# Altium PCB Standard 60 02.PcbDoc
Units mil, origin at the board's own origin, x right, y up, seen from the top; angles counter-clockwise.
Board outline 11157.21 x 3737.43 mil, 2 copper layers (Top Layer, Bottom Layer); 138 components, 95 nets, 541 pads, 9 vias.
Unrouted connection lines stored in the file: 30.
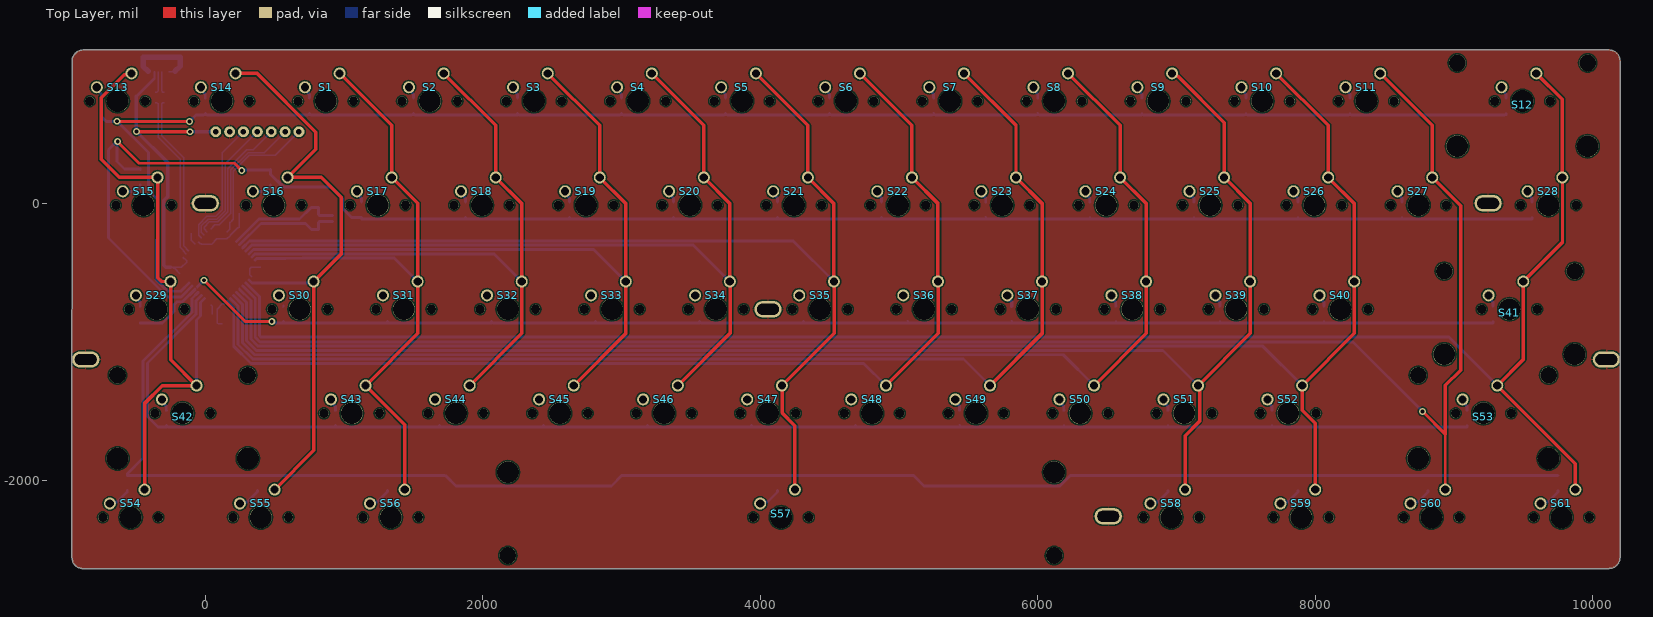
[diagram p0: Top Layer view]
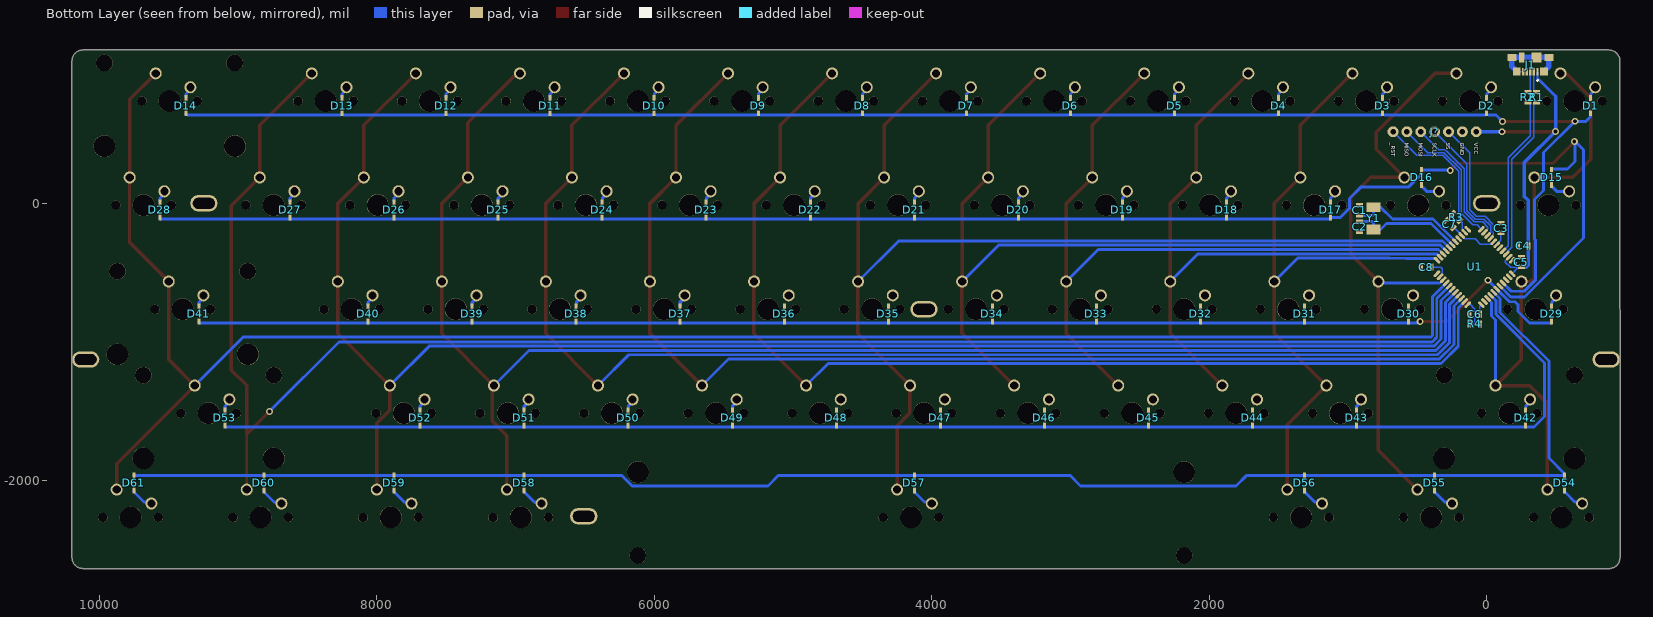
[diagram p1: Bottom Layer view, seen from below]

## Layer stack, top to bottom
Top Solder: solder mask 0.4, Solder Resist, Dk 3.5
Top Layer: signal copper 1.4
Dielectric 1: dielectric 12.6, FR-4, Dk 4.8
Bottom Layer: signal copper 1.4
Bottom Solder: solder mask 0.4, Solder Resist, Dk 3.5

## Board outline
-882.16,-2632.57 cw(c-882.16,-2553.83) -960.9,-2553.82 -960.15,1026.14 cw(c-881.41,1026.12) -881.41,1104.86 10117.57,1104.86 cw(c10117.57,1026.12) 10196.31,1026.12 10196.31,-2553.65 cw(c10117.57,-2553.65) 10117.57,-2632.39

## Design rules (kind name [scope] priority, off if disabled: settings)
Clearance [All] p1: gap=10 ignorepadtopadclearanceinfootprint=TRUE
ComponentClearance [All] p1: gap=10 collisioncheckmode=3 verticalgap=10 showdistances=FALSE donotcheckwithout3dbody=TRUE checkcomponentboundary=TRUE
DiffPairsRouting [All] p1: maxlimit=100 minlimit=10 mostfreqgap=15 toplayer_minwidth=10 toplayer_maxwidth=100 toplayer_prefwidth=15 bottomlayer_minwidth=10 bottomlayer_maxwidth=100 bottomlayer_prefwidth=15 maxuncoupledlength=500
PolygonConnect [All] p1: connectstyle=Relief reliefconductorwidth=10 reliefentries=4 polygonreliefangle="90 Angle" airgapwidth=10
RoutingVias [All] p1: holewidth=27.56 width=47.24 viastyle="Through Hole" minholewidth=19.68 minwidth=39.37 maxholewidth=39.37 maxwidth=59.06
SolderMaskExpansion [All] p1: expansion=4 istentingtop=FALSE
Width [All] p1: maxlimit=1000 minlimit=10 preferedwidth=25
28 further rules are at their usual default settings.

## Classes and differential pairs
net class ROW[5..1]: ROW1 ROW2 ROW3 ROW4 ROW5
net class COL[14..1]: COL1 COL2 COL3 COL4 COL5 COL6 COL7 COL8 COL9 COL10 COL11 COL12 COL13 COL14
component class MCU: C1 C2 C3 C4 C5 C6 C7 C8 J1 J? R1 R2 R3 R4 U1 Y1
component class matrix: D1 D2 D3 D4 D5 D6 D7 D8 D9 D10 D11 D12 D13 D14 D15 D16 D17 D18 D19 D20 D21 D22 D23 D24 D25 D26 D27 D28 D29 D30 D31 D32 D33 D34 D35 D36 D37 D38 D39 D40 D41 D42 D43 D44 D45 D46 D47 D48 D49 D50 D51 D52 D53 D54 D55 D56 D57 D58 D59 D60 D61 S1 S2 S3 S4 S5 S6 S7 S8 S9 S10 S11 S12 S13 S14 S15 S16 S17 S18 S19 S20 S21 S22 S23 S24 S25 S26 S27 S28 S29 S30 S31 S32 S33 S34 S35 S36 S37 S38 S39 S40 S41 S42 S43 S44 S45 S46 S47 S48 S49 S50 S51 S52 S53 S54 S55 S56 S57 S58 S59 S60 S61
differential pair XT: +XT_P -XT_N
differential pair DP: +DP_P -DP_N
differential pair DP1: +DP1_P -DP1_N

## Components (designator, comment, footprint, x,y, rotation, side; value= is the part's Value field where it differs from the comment)
C1 "Cap" 0805 915.42,-49.41 r270 bottom value=22pf
C2 "Cap" 0805 915.42,-169.41 r90 bottom value=22pf
C3 "Cap" 0805 -104.5,-178.21 r270 bottom value=1uf
C4 "Cap" 0805 -263.19,-306.61 r180 bottom value=10uf
C5 "Cap" 0805 -250.81,-423.49 r270 bottom value=0.1uf
C6 "Cap" 0805 86.13,-799.99 r180 bottom value=0.1uf
C7 "Cap" 0805 266.84,-150.46 r225 bottom value=0.1uf
C8 "Cap" 0805 435.88,-459.48 r180 bottom value=0.1uf
D1 "Diode" SOD-323F -750,703.12 r90 bottom
D2 "Diode" SOD-323F 0,703.12 r90 bottom
D3 "Diode" SOD-323F 750,703.12 r90 bottom
D4 "Diode" SOD-323F 1500,703.12 r90 bottom
D5 "Diode" SOD-323F 2250,703.12 r90 bottom
D6 "Diode" SOD-323F 3000,703.12 r90 bottom
D7 "Diode" SOD-323F 3750,703.12 r90 bottom
D8 "Diode" SOD-323F 4500,703.12 r90 bottom
D9 "Diode" SOD-323F 5250,703.12 r90 bottom
D10 "Diode" SOD-323F 6000,703.12 r90 bottom
D11 "Diode" SOD-323F 6750,703.12 r90 bottom
D12 "Diode" SOD-323F 7500,703.12 r90 bottom
D13 "Diode" SOD-323F 8250,703.12 r90 bottom
D14 "Diode" SOD-323F 9375,703.12 r90 bottom
D15 "Diode" SOD-323F -468.75,187.5 r270 bottom
D16 "Diode" SOD-323F 468.75,187.5 r270 bottom
D17 "Diode" SOD-323F 1125,-46.88 r90 bottom
D18 "Diode" SOD-323F 1875,-46.88 r90 bottom
D19 "Diode" SOD-323F 2625,-46.88 r90 bottom
D20 "Diode" SOD-323F 3375,-46.88 r90 bottom
D21 "Diode" SOD-323F 4125,-46.88 r90 bottom
D22 "Diode" SOD-323F 4875,-46.88 r90 bottom
D23 "Diode" SOD-323F 5625,-46.88 r90 bottom
D24 "Diode" SOD-323F 6375,-46.88 r90 bottom
D25 "Diode" SOD-323F 7125,-46.88 r90 bottom
D26 "Diode" SOD-323F 7875,-46.88 r90 bottom
D27 "Diode" SOD-323F 8625,-46.88 r90 bottom
D28 "Diode" SOD-323F 9562.5,-46.88 r90 bottom
D29 "Diode" SOD-323F -468.75,-796.88 r90 bottom
D30 "Diode" SOD-323F 562.5,-796.88 r90 bottom
D31 "Diode" SOD-323F 1312.5,-796.88 r90 bottom
D32 "Diode" SOD-323F 2062.5,-796.88 r90 bottom
D33 "Diode" SOD-323F 2812.5,-796.88 r90 bottom
D34 "Diode" SOD-323F 3562.5,-796.88 r90 bottom
D35 "Diode" SOD-323F 4312.5,-796.88 r90 bottom
D36 "Diode" SOD-323F 5062.5,-796.88 r90 bottom
D37 "Diode" SOD-323F 5812.5,-796.88 r90 bottom
D38 "Diode" SOD-323F 6562.5,-796.88 r90 bottom
D39 "Diode" SOD-323F 7312.5,-796.88 r90 bottom
D40 "Diode" SOD-323F 8062.5,-796.88 r90 bottom
D41 "Diode" SOD-323F 9281.25,-796.88 r90 bottom
D42 "Diode" SOD-323F -281.25,-1546.88 r90 bottom
D43 "Diode" SOD-323F 937.5,-1546.88 r90 bottom
D44 "Diode" SOD-323F 1687.5,-1546.88 r90 bottom
D45 "Diode" SOD-323F 2437.5,-1546.88 r90 bottom
D46 "Diode" SOD-323F 3187.5,-1546.88 r90 bottom
D47 "Diode" SOD-323F 3937.5,-1546.88 r90 bottom
D48 "Diode" SOD-323F 4687.5,-1546.88 r90 bottom
D49 "Diode" SOD-323F 5437.5,-1546.88 r90 bottom
D50 "Diode" SOD-323F 6187.5,-1546.88 r90 bottom
D51 "Diode" SOD-323F 6937.5,-1546.88 r90 bottom
D52 "Diode" SOD-323F 7687.5,-1546.88 r90 bottom
D53 "Diode" SOD-323F 9093.75,-1546.88 r90 bottom
D54 "Diode" SOD-323F -562.5,-2015.63 r270 bottom
D55 "Diode" SOD-323F 375,-2015.63 r270 bottom
D56 "Diode" SOD-323F 1312.5,-2015.63 r270 bottom
D57 "Diode" SOD-323F 4125,-2015.63 r270 bottom
D58 "Diode" SOD-323F 6937.5,-2015.63 r270 bottom
D59 "Diode" SOD-323F 7875,-2015.63 r270 bottom
D60 "Diode" SOD-323F 8812.5,-2015.63 r270 bottom
D61 "Diode" SOD-323F 9750,-2015.63 r270 bottom
J1 "Molex 473460001" "MOLEX 47346 0001" -314.96,1037.4 r0 bottom locked
J? "ISP HEADER" "SPI HEADER" 75,515.62 r270 bottom
R1 "Res" 0805 -359.33,763.85 r270 bottom value=22
R2 "Res" 0805 -296.46,763.54 r270 bottom value=22
R3 "Res" 0805 219.27,-99.23 r225 bottom value=10k
R4 "Res" 0805 86.13,-869.99 r180 bottom value=10k
S1 "1u" MX1U 868.06,736.3 r0 top locked
S2 "1u" MX1U 1618.03,736.3 r0 top locked
S3 "1u" MX1U 2368.06,736.3 r0 top locked
S4 "1u" MX1U 3118.06,736.3 r0 top locked
S5 "1u" MX1U 3868.06,736.3 r0 top locked
S6 "1u" MX1U 4618.06,736.3 r0 top locked
S7 "1u" MX1U 5368.02,736.3 r0 top locked
S8 "1u" MX1U 6118.06,736.3 r0 top locked
S9 "1u" MX1U 6868.02,736.3 r0 top locked
S10 "1u" MX1U 7618.06,736.3 r0 top locked
S11 "1u" MX1U 8368.06,736.3 r0 top locked
S12 "2u" MX2U 9493.02,736.3 r0 top locked
S13 "1u" MX1U -631.94,736.3 r0 top locked
S14 "1u" MX1U 118.06,736.3 r0 top locked
S15 "1u" MX1U -444.42,-13.7 r0 top locked
S16 "1u" MX1U 493.03,-13.7 r0 top locked
S17 "1u" MX1U 1243.06,-13.7 r0 top locked
S18 "1u" MX1U 1993.06,-13.7 r0 top locked
S19 "1u" MX1U 2743.06,-13.7 r0 top locked
S20 "1u" MX1U 3493.03,-13.7 r0 top locked
S21 "1u" MX1U 4243.06,-13.7 r0 top locked
S22 "1u" MX1U 4993.02,-13.7 r0 top locked
S23 "1u" MX1U 5743.06,-13.7 r0 top locked
S24 "1u" MX1U 6493.06,-13.7 r0 top locked
S25 "1u" MX1U 7243.02,-13.7 r0 top locked
S26 "1u" MX1U 7993.06,-13.7 r0 top locked
S27 "1u" MX1U 8743.02,-13.7 r0 top locked
S28 "1u" MX1U 9680.52,-13.7 r0 top locked
S29 "1u" MX1U -350.67,-763.73 r0 top locked
S30 "1u" MX1U 680.59,-763.73 r0 top locked
S31 "1u" MX1U 1430.5,-763.73 r0 top locked
S32 "1u" MX1U 2180.53,-763.73 r0 top locked
S33 "1u" MX1U 2930.54,-763.73 r0 top locked
S34 "1u" MX1U 3680.52,-763.73 r0 top locked
S35 "1u" MX1U 4430.52,-763.73 r0 top locked
S36 "1u" MX1U 5180.52,-763.73 r0 top locked
S37 "1u" MX1U 5930.58,-763.73 r0 top locked
S38 "1u" MX1U 6680.52,-763.73 r0 top locked
S39 "1u" MX1U 7430.58,-763.73 r0 top locked
S40 "1u" MX1U 8180.58,-763.73 r0 top locked
S41 "2u" MX2U 9399.25,-763.73 r0 top locked
S42 "2u" MX2U -163.22,-1513.71 r0 top locked
S43 "1u" MX1U 1055.59,-1513.71 r0 top locked
S44 "1u" MX1U 1805.59,-1513.71 r0 top locked
S45 "1u" MX1U 2555.59,-1513.71 r0 top locked
S46 "1u" MX1U 3305.53,-1513.71 r0 top locked
S47 "1u" MX1U 4055.58,-1513.71 r0 top locked
S48 "1u" MX1U 4805.52,-1513.71 r0 top locked
S49 "1u" MX1U 5555.58,-1513.71 r0 top locked
S50 "1u" MX1U 6305.58,-1513.71 r0 top locked
S51 "1u" MX1U 7055.52,-1513.71 r0 top locked
S52 "1u" MX1U 7805.58,-1513.71 r0 top locked
S53 "2u" MX2U 9211.78,-1513.71 r0 top locked
S54 "1u" MX1U -538.19,-2263.7 r0 top locked
S55 "1u" MX1U 399.28,-2263.7 r0 top locked
S56 "1u" MX1U 1336.81,-2263.7 r0 top locked
S57 "6.25u" "MX6.25U FLIPPED STAB" 4149.32,-2263.7 r0 top locked
S58 "1u" MX1U 6961.78,-2263.7 r0 top locked
S59 "1u" MX1U 7899.32,-2263.7 r0 top locked
S60 "1u" MX1U 8836.78,-2263.7 r0 top locked
S61 "1u" MX1U 9774.28,-2263.7 r0 top locked
U1 "ATmega32U4" TQFP44 86.99,-458.77 r315 bottom locked
Y1 "XTAL" ABM3 815.42,-109.41 r270 bottom value=16MHz

## Footprints (in the part's own frame and the unit in brackets; to place one, negate y for a bottom-side part, rotate by r counter-clockwise, add the part's x,y. Pads: shape width x height; smd on the part's side, far side on the other; paste and mask are expansions set on the pad)
0805 [mil]
  rect 28x51 smd: 1(-37.5,0) 2(37.5,0)
ABM3 [mil] "ABRACON SMD XTAL PACKAGE"
  rect 70x100 smd: 1(-80,0) 2(80,0)
"MOLEX 47346 0001" [mm]
  rect 0.45x1.38 smd paste+0 mask+0: 1(-1.3,2.31) 2(-0.65,2.31) 3(0,2.31) 4(0.65,2.31) 5(1.3,2.31)
  rect 1.425x1.55 smd paste+0 mask+0: 6(-2.488,2.225) 7(2.488,2.225)
  rect 1.65x1.3 smd paste+0 mask+0: 8(-3.375,-0.35) 11(3.375,-0.35)
  rect 1.8x1.9 smd paste+0 mask+0: 9(-1.15,-0.35)
  rect 1x1.9 smd paste+0 mask+0: 10(1.55,-0.35)
  silkscreen extent -1.45,3.73 -1.2,3.97
MX1U [mm]
  round 2.2 hole 1.5: 1(2.54,5.08) 2(-3.81,2.54)
  round 1.7 hole 1.7 unplated: ""(-5.08,0) ""(5.08,0)
  round 4 hole 4 unplated: ""(0,0)
MX2U [mil]
  round 86.61 hole 59.06: 1(100,200) 2(-150,100)
  round 157 hole 157 unplated: ""(-470,-325) ""(470,-325)
  round 120 hole 120 unplated: ""(-470,275) ""(470,275)
  round 66.93 hole 66.93 unplated: ""(-200,0) ""(200,0)
  round 157.48 hole 157.48 unplated: ""(0,0)
"MX6.25U FLIPPED STAB" [mm]
  round 2.2 hole 1.5: 1(2.54,5.08) 2(-3.81,2.54)
  round 3.048 hole 3.048 unplated: ""(-50,-6.985) ""(50,-6.985)
  round 3.988 hole 3.988 unplated: ""(-50,8.255) ""(50,8.255)
  round 1.7 hole 1.7 unplated: ""(-5.08,0) ""(5.08,0)
  round 4 hole 4 unplated: ""(0,0)
SOD-323F [mm]
  rect 1.05x0.55 smd: 1(-1.4,0) 2(1.4,0)
"SPI HEADER" [mm]
  round 2 hole 1: 1(0,0) 2(0,-2.54) 3(0,-5.08) 4(0,-7.62) 5(0,-10.16) 6(0,-12.7) 7(0,-15.24)
TQFP44 [mm] "TQFP, 44-Leads, Body 10.00x10.00mm"
  oval 1.5x0.55 smd: 1(-5.75,4) 2(-5.75,3.2) 3(-5.75,2.4) 4(-5.75,1.6) 5(-5.75,0.8) 6(-5.75,0) 7(-5.75,-0.8) 8(-5.75,-1.6) 9(-5.75,-2.4) 10(-5.75,-3.2) 11(-5.75,-4) 23(5.75,-4) 24(5.75,-3.2) 25(5.75,-2.4) 26(5.75,-1.6) 27(5.75,-0.8) 28(5.75,0) 29(5.75,0.8) 30(5.75,1.6) 31(5.75,2.4) 32(5.75,3.2) 33(5.75,4)
  oval 0.55x1.5 smd: 12(-4,-5.75) 13(-3.2,-5.75) 14(-2.4,-5.75) 15(-1.6,-5.75) 16(-0.8,-5.75) 17(0,-5.75) 18(0.8,-5.75) 19(1.6,-5.75) 20(2.4,-5.75) 21(3.2,-5.75) 22(4,-5.75) 34(4,5.75) 35(3.2,5.75) 36(2.4,5.75) 37(1.6,5.75) 38(0.8,5.75) 39(0,5.75) 40(-0.8,5.75) 41(-1.6,5.75) 42(-2.4,5.75) 43(-3.2,5.75) 44(-4,5.75)
  silkscreen extent -5.87,4.7 -5.63,4.95

## Part data
C1 C2 C3 C4 C5 C6 C7 C8: "Capacitor"
J1: "Micro usb receptacle"
R1 R2 R3 R4: "Resistor"
  R1: LatestRevisionDate=17-Jul-2002, LatestRevisionNote="Re-released for DXP Platform.", PackageDescription="Axial Device, Thru-Hole; 2 Leads; 0.4 in Pin Spacing", PackageReference=AXIAL-0.4, Published=8-Jun-2000, Publisher="Altium Limited"
S1 S2 S3 S4 S5 S6 S7 S8 S9 S10 S11 S13 S14 S15 S16 S17 S18 S19 S20 S21 S22 S23 S24 S25 S26 S27 S28 S29 S30 S31 S32 S33 S34 S35 S36 S37 S38 S39 S40 S43 S44 S45 S46 S47 S48 S49 S50 S51 S52 S54 S55 S56 S58 S59 S60 S61: "1-2u Mx Switch"
S12 S41 S42 S53: "2-3u Mx Switch with pcb mount stabs"
S57: "6.25u Mx Switch with pcb mount stabs"
U1: "8-bit AVR Microcontroller", Manufacturer="Microchip / Atmel", Manufacturer Part Number=ATMEGA32U4-AU, ComponentLink1Description="Manufacturer URL", ComponentLink1URL=http://www.atmel.com/, ComponentLink2Description="ATmega16U4/32U4 Datasheet", ComponentLink2URL=http://www.atmel.com/dyn/resources/prod_documents/doc7766.pdf, ComponentLink3Description="ATmega16U4 ATmega32U4 Summary", ComponentLink3URL=http://www.atmel.com/dyn/resources/prod_documents/7766S.pdf, DatasheetVersion="revF, Nov-2010", PackageDescription="44-Pin Plastic Thin Quad Flat Pack, 10 x 10 x 1.0 mm Body, 0.8 mm Pitch (TQFP)", PackageReference=44ML, PackageVersion="rev.G, Jul-2007", RevisionNote="DatasheetVersion updated. URLs added."
Y1: "Crystal Oscillator"

## Free pads (board coordinates)
  oval 196.85x118.11 hole 78.74 slot 157.48 at 0 deg: 3(9246.04,0) 4(10097.89,-1125.89) 5(6507.81,-2255.87) 6(4055.54,-763.79) 7(-861.73,-1125.93) 8(0,0)

## Via types
v1: diameter 50, hole 28, Top Layer to Bottom Layer, 9 vias

## Nets (pads, with @x,y where several pads share a name; then routed paths per layer and width w, separated by ;. In a path a pad name is that pad's centre, name@x,y a point inside that pad or via, vN(x,y) a via of type N, cw(c..) or ccw(c..) an arc to the next point about the centre after c; other vN are vias at no path point)
\R\E\S\E\T\: J?.7 R3.2 U1.13 | length 1051.8
  Bottom Layer w10: U1.13 157.98,-206.46 176.5,-187.94 176.5,-142.01 R3.2 ; R3.2@190.38,-126.77 202.98,-114.17 202.98,-70.92 202.86,-70.8 202.86,231.83 316.44,345.41 504.79,345.41 J?.7
COL1: S13.1 S15.1 S29.1 S42.1 S54.1 U1.36 | length 4548.6
  Top Layer w25: S13.1 -542.5,925.74 -585.67,925.74 -750,761.42 -750,316.29 -620.01,186.3 S15.1 -344.42,29.47 -343.18,28.23 -343.18,-535.79 -315.24,-563.73 S29.1 ; S54.1 -438.19,-1442.81 -309.09,-1313.71 S42.1 -249.43,-1127.5 S29.1@-249.43,-564.97
  Bottom Layer w21: S42.1 -63.22,-840.28 -34.7,-811.77 -34.7,-714.09 U1.36
COL2: S14.1 S16.1 S30.1 S55.1 U1.25 | length 4396.1
  Top Layer w25: S14.1 372.77,936.3 795.69,513.37 795.69,388.96 S16.1 836.71,186.3 978.52,44.48 978.52,-365.79 S30.1 781.83,-564.97 781.83,-1781.16 S55.1
  Bottom Layer w21: U1.25 336.15,-574.31 770,-574.31 S30.1
COL3: S1.1 S17.1 S31.1 S43.1 S56.1 U1.22 | length 4754
  Top Layer w25: S1.1 1343.06,561.3 S17.1 1530.5,-1.15 S31.1 1531.74,-564.97 1531.74,-937.55 S43.1 1436.81,-1594.93 S56.1
  Bottom Layer w21: U1.22 371.64,-396.83 580.46,-396.83 581.47,-395.82 701.42,-395.82 702.19,-395.05 1361.82,-395.05 S31.1
COL4: S2.1 S18.1 S32.1 S44.1 U1.21 | length 4672.8
  Top Layer w25: S2.1@1719.27,935.06 2093.06,561.27 S18.1 ; S44.1 2281.77,-937.52 2281.77,-564.97 S32.1 2280.53,-1.18 S18.1@2094.3,185.06
  Bottom Layer w21: U1.21 359.88,-364.05 575.17,-364.05 2080.85,-364.05 S32.1
COL5: S3.1 S19.1 S33.1 S45.1 U1.20 | length 5461.5
  Top Layer w25: S3.1@2469.3,935.06 2843.06,561.29 S19.1 ; S45.1 3031.78,-937.51 3031.78,-564.97 S33.1 3030.54,-1.17 S19.1@2844.3,185.06
  Bottom Layer w21: U1.20 346.34,-333.05 562.33,-333.05 610.17,-333.05 2799.85,-333.05 S33.1
COL6: S4.1 S20.1 S34.1 S46.1 U1.19 | length 6253.7
  Top Layer w25: S4.1 3593.03,561.34 S20.1 3780.52,-1.2 S34.1 3781.76,-564.97 3781.76,-937.47 S46.1
  Bottom Layer w21: U1.19 332.8,-302.05 601.77,-302.05 3518.84,-302.05 S34.1
COL7: S5.1 S21.1 S35.1 S47.1 S57.1 U1.18 | length 7831.2
  Top Layer w25: S5.1 4343.06,561.3 S21.1 4530.52,-1.16 S35.1 4531.77,-564.97 4531.77,-937.52 S47.1 4156.82,-1314.95 4156.82,-1511.22 4249.32,-1603.72 S57.1
  Bottom Layer w21: U1.18 319.26,-271.05 593.37,-271.05 4237.84,-271.05 S35.1
COL8: S6.1 S22.1 S36.1 S48.1 U1.32 | length 7795.4
  Top Layer w25: S6.1@4719.3,935.06 5093.02,561.34 S22.1 ; S48.1 5281.77,-937.46 5281.77,-564.97 S36.1 5280.52,-1.2 S22.1@5094.27,185.06
  Bottom Layer w21: U1.32 204.65,-754.6 204.65,-1029.64 328.79,-1153.78 4745.6,-1153.78 S48.1
COL9: S7.1 S23.1 S37.1 S49.1 U1.31 | length 8525.9
  Top Layer w25: S7.1@5483.74,924.77 5483.74,920.59 5843.06,561.26 S23.1 ; S49.1 6030.58,-938.71 6030.58,-806.91 6031.82,-805.67 6031.82,-721.8 6030.58,-720.56 S37.1 6030.58,-1.22 5845.17,184.2 S23.1@5845.17,194.75
  Bottom Layer w21: U1.31 235.65,-741.06 235.65,-1016.8 341.63,-1122.78 5464.66,-1122.78 S49.1
COL10: S8.1 S24.1 S38.1 S50.1 U1.30 | length 9270.2
  Top Layer w25: S8.1@6219.3,935.06 6593.06,561.3 S24.1 ; S50.1 6781.77,-937.52 6781.77,-564.97 S38.1 6780.52,-1.16 S24.1@6594.3,185.06
  Bottom Layer w21: U1.30 266.65,-727.52 266.65,-1003.96 354.47,-1091.78 6183.66,-1091.78 S50.1
COL11: S9.1 S25.1 S39.1 S51.1 S58.1 U1.29 | length 10820.4
  Top Layer w25: S9.1 6984.7,936.3 7006.64,914.36 7010.36,914.36 7343.02,581.7 S25.1 7530.58,-1.26 S39.1 7531.82,-564.97 7531.82,-937.41 S51.1 7165.89,-1324.07 7165.89,-1570.91 7061.78,-1675.02 S58.1
  Bottom Layer w21: U1.29 297.65,-713.97 297.65,-991.12 367.31,-1060.78 6902.6,-1060.78 S51.1
COL12: S10.1 S26.1 S40.1 S52.1 S59.1 U1.28 | length 11518.9
  Top Layer w25: S10.1@7719.3,935.06 8093.06,561.3 S26.1 ; S59.1 7999.32,-1586.59 7905.58,-1492.85 S52.1 8281.82,-937.46 8281.82,-564.97 S40.1 8280.58,-1.22 S26.1@8104.85,174.51
  Bottom Layer w21: U1.28 328.65,-700.43 328.65,-978.28 380.15,-1029.78 7621.66,-1029.78 S52.1
COL13: S11.1 S27.1 S60.1 U1.27 | length 12558.7
  Top Layer w21: v1(8772.33,-1499.53) 8936.78,-1663.97 S60.1
  Top Layer w25: S11.1 8843.02,561.34 S27.1 9047.54,-18.22 9047.54,-1202.13 8936.78,-1312.89 8936.78,-1663.97
  Bottom Layer w21: U1.27 359.65,-686.89 359.65,-965.44 392.99,-998.78 8271.59,-998.78 v1(8772.33,-1499.53)
COL14: S12.1 S28.1 S41.1 S53.1 S61.1 U1.26 | length 12995.2
  Top Layer w25: S12.1@9594.27,935.06 9780.52,748.8 S28.1 9781.77,185.06 9781.77,-281.21 S41.1 9500.49,-564.97 9500.49,-1125 S53.1 9874.28,-1876.21 S61.1
  Bottom Layer w21: U1.26 390.65,-673.35 390.65,-952.6 402.95,-964.9 8962.98,-964.9 S53.1
DP1_N: R1.2 U1.3 | length 1188.6
  Bottom Layer w10: R1.2 -349.39,726.35 -340.39,717.35 -340.39,475.53 -181.22,316.35 -181.22,-317.47 -158.95,-339.74 -158.95,-343.31 -139.9,-362.36 U1.3
DP1_P: R2.2 U1.4 | length 1165.9
  Bottom Layer w10: R2.2 -306.39,726.04 -315.39,717.04 -315.39,485.89 -156.22,326.71 -156.22,-307.11 -118.88,-344.46 U1.4@-118.49,-344.46
DP_N: J1.2 R1.1 | length 159
  Bottom Layer w10: R1.1 -349.39,801.35 -340.39,810.35 -340.39,886.26 -340.26,886.39 -340.26,946.16 J1.2
DP_P: J1.3 R2.1 | length 159.3
  Bottom Layer w10: J1.3 -315.26,946.16 -315.26,876.04 -315.39,875.9 -315.39,810.04 -306.39,801.04 R2.1
GND: C1.1 C2.1 C3.1 C4.1 C5.1 C6.1 C7.1 C8.1 J1.5 J1.6 J1.7 J1.8 J1.9 J1.10 J1.11 J?.2 pad.3 pad.4 pad.5 pad.6 pad.7 pad.8 R4.2 U1.5 U1.15 U1.23 U1.35 U1.43 | length 591.5
  Bottom Layer w10: J1.5 -260.43,949.8 J1.7
  Bottom Layer w25: J1.6 J1.6@-412.89,952.26 ; J1.7 J1.7@-217.03,952.26 ; pad.8@-32.46,-32.46 pad.8
  Bottom Layer w40: J1.6@-412.89,952.26 -447.83,987.2 J1.8 J1.9 J1.10 J1.11 -182.09,987.2 J1.7@-217.03,952.26
HWB: R4.1 U1.33 | length 207.7
  Bottom Layer w10: R4.1 91.98,-869.99 86.13,-864.13 86.13,-763.3 123.66,-725.77 131.27,-725.77 U1.33
MISO: J?.6 U1.11 | length 1010.1
  Bottom Layer w10: U1.11@37.41,-185.75 69.11,-154.06 99.33,-154.06 182.86,-70.53 182.86,240.11 308.16,365.41 424.79,365.41 J?.6
MOSI: J?.5 U1.10 | length 997.4
  Bottom Layer w10: U1.10@15.14,-208.75 -8.57,-185.05 -8.57,-171.21 28.59,-134.06 91.05,-134.06 162.86,-62.24 162.86,248.4 299.87,385.41 344.79,385.41 J?.5
NetD1_2: D1.2 S13.2 | length 91.3
  Bottom Layer w21: S13.2 -781.94,818.54 -750.33,786.92 -750.33,758.57 D1.2
NetD2_2: D2.2 S14.2 | length 91.3
  Bottom Layer w21: S14.2 -31.94,818.54 -0.33,786.92 -0.33,758.57 D2.2
NetD3_2: D3.2 S1.2 | length 91.3
  Bottom Layer w21: S1.2 718.06,818.54 749.67,786.93 749.67,758.57 D3.2
NetD4_2: D4.2 S2.2 | length 91.3
  Bottom Layer w21: S2.2 1468.03,818.54 1499.67,786.9 1499.67,758.57 D4.2
NetD5_2: D5.2 S3.2 | length 91.3
  Bottom Layer w21: S3.2 2218.06,818.54 2249.67,786.93 2249.67,758.57 D5.2
NetD6_2: D6.2 S4.2 | length 91.3
  Bottom Layer w21: S4.2 2968.06,818.54 2999.67,786.93 2999.67,758.57 D6.2
NetD7_2: D7.2 S5.2 | length 91.3
  Bottom Layer w21: S5.2 3718.06,818.54 3749.67,786.93 3749.67,758.57 D7.2
NetD8_2: D8.2 S6.2 | length 91.3
  Bottom Layer w21: S6.2 4468.06,818.54 4499.67,786.93 4499.67,758.57 D8.2
NetD9_2: D9.2 S7.2 | length 91.3
  Bottom Layer w21: S7.2 5218.02,818.54 5249.67,786.89 5249.67,758.57 D9.2
NetD10_2: D10.2 S8.2 | length 91.3
  Bottom Layer w21: S8.2 5968.06,818.54 5999.67,786.93 5999.67,758.57 D10.2
NetD11_2: D11.2 S9.2 | length 91.3
  Bottom Layer w21: S9.2 6718.02,818.54 6749.67,786.89 6749.67,758.57 D11.2
NetD12_2: D12.2 S10.2 | length 91.3
  Bottom Layer w21: S10.2 7468.06,818.54 7499.67,786.93 7499.67,758.57 D12.2
NetD13_2: D13.2 S11.2 | length 91.3
  Bottom Layer w21: S11.2 8218.06,818.54 8249.67,786.93 8249.67,758.57 D13.2
NetD14_2: D14.2 S12.2 | length 91.3
  Bottom Layer w21: S12.2 9343.02,818.54 9374.67,786.89 9374.67,758.57 D14.2
NetD15_2: D15.2 S15.2 | length 150.5
  Bottom Layer w21: S15.2 -504.99,86.3 -468.75,122.54 D15.2
NetD16_2: D16.2 S16.2 | length 150.6
  Bottom Layer w21: S16.2 432.51,86.3 468.75,122.54 D16.2
NetD17_2: D17.2 S17.2 | length 91.3
  Bottom Layer w21: S17.2 1093.06,68.54 1124.67,36.93 1124.67,8.57 D17.2
NetD18_2: D18.2 S18.2 | length 91.3
  Bottom Layer w21: S18.2 1843.06,68.54 1874.67,36.93 1874.67,8.57 D18.2
NetD19_2: D19.2 S19.2 | length 91.3
  Bottom Layer w21: S19.2 2593.06,68.54 2624.67,36.93 2624.67,8.57 D19.2
NetD20_2: D20.2 S20.2 | length 91.3
  Bottom Layer w21: S20.2 3343.03,68.54 3374.67,36.89 3374.67,8.57 D20.2
NetD21_2: D21.2 S21.2 | length 91.3
  Bottom Layer w21: S21.2 4093.06,68.54 4124.67,36.93 4124.67,8.57 D21.2
NetD22_2: D22.2 S22.2 | length 91.3
  Bottom Layer w21: S22.2 4843.02,68.54 4874.67,36.89 4874.67,8.57 D22.2
NetD23_2: D23.2 S23.2 | length 91.3
  Bottom Layer w21: S23.2 5593.06,68.54 5624.67,36.93 5624.67,8.57 D23.2
NetD24_2: D24.2 S24.2 | length 91.3
  Bottom Layer w21: S24.2 6343.06,68.54 6374.67,36.93 6374.67,8.57 D24.2
NetD25_2: D25.2 S25.2 | length 91.3
  Bottom Layer w21: S25.2 7093.02,68.54 7124.67,36.89 7124.67,8.57 D25.2
NetD26_2: D26.2 S26.2 | length 91.3
  Bottom Layer w21: S26.2 7843.06,68.54 7874.67,36.93 7874.67,8.57 D26.2
NetD27_2: D27.2 S27.2 | length 91.3
  Bottom Layer w21: S27.2 8593.02,68.54 8624.67,36.89 8624.67,8.57 D27.2
NetD28_2: D28.2 S28.2 | length 91.3
  Bottom Layer w21: S28.2 9530.52,68.54 9562.17,36.89 9562.17,8.57 D28.2
NetD29_2: D29.2 S29.2 | length 91.2
  Bottom Layer w21: S29.2 -500.67,-681.49 -469.08,-713.08 -469.08,-741.43 D29.2
NetD30_2: D30.2 S30.2 | length 0.5
  Bottom Layer w21: D30.2@562.17,-741.43 D30.2
NetD31_2: D31.2 S31.2
NetD32_2: D32.2 S32.2
NetD33_2: D33.2 S33.2
NetD34_2: D34.2 S34.2
NetD35_2: D35.2 S35.2
NetD36_2: D36.2 S36.2
NetD37_2: D37.2 S37.2 | length 91.2
  Bottom Layer w25: S37.2 5780.58,-680.4 5810.83,-710.65 5810.83,-740.08 D37.2
NetD38_2: D38.2 S38.2 | length 91.3
  Bottom Layer w21: S38.2 6530.52,-681.49 6562.17,-713.13 6562.17,-741.43 D38.2
NetD39_2: D39.2 S39.2 | length 91.2
  Bottom Layer w21: S39.2 7280.58,-681.49 7312.17,-713.08 7312.17,-741.43 D39.2
NetD40_2: D40.2 S40.2 | length 91.2
  Bottom Layer w21: S40.2 8030.58,-681.49 8062.17,-713.08 8062.17,-741.43 D40.2
NetD41_2: D41.2 S41.2 | length 91.3
  Bottom Layer w21: S41.2 9249.25,-681.49 9280.92,-713.16 9280.92,-741.43 D41.2
NetD42_2: D42.2 S42.2 | length 91.3
  Bottom Layer w21: S42.2 -313.22,-1431.46 -281.58,-1463.1 -281.58,-1491.43 D42.2
NetD43_2: D43.2 S43.2 | length 91.3
  Bottom Layer w21: S43.2 905.59,-1431.46 937.17,-1463.05 937.17,-1491.43 D43.2
NetD44_2: D44.2 S44.2
NetD45_2: D45.2 S45.2
NetD46_2: D46.2 S46.2
NetD47_2: D47.2 S47.2
NetD48_2: D48.2 S48.2
NetD49_2: D49.2 S49.2 | length 91.3
  Bottom Layer w21: S49.2 5405.58,-1431.46 5437.17,-1463.05 5437.17,-1491.43 D49.2
NetD50_2: D50.2 S50.2 | length 91.3
  Bottom Layer w21: S50.2 6155.58,-1431.46 6187.17,-1463.05 6187.17,-1491.43 D50.2
NetD51_2: D51.2 S51.2 | length 91.3
  Bottom Layer w21: S51.2 6905.52,-1431.46 6937.17,-1463.11 6937.17,-1491.43 D51.2
NetD52_2: D52.2 S52.2 | length 91.3
  Bottom Layer w21: S52.2 7655.58,-1431.46 7687.17,-1463.05 7687.17,-1491.43 D52.2
NetD53_2: D53.2 S53.2 | length 91.3
  Bottom Layer w21: S53.2 9061.78,-1431.46 9093.42,-1463.1 9093.42,-1491.43 D53.2
NetD54_2: D54.2 S54.2 | length 170
  Bottom Layer w21: S54.2 -677.3,-2152.81 -635.3,-2152.81 -563.4,-2080.91 -562.83,-2080.91 -562.5,-2080.59 D54.2
NetD55_2: D55.2 S55.2 | length 170
  Bottom Layer w21: S55.2 260.17,-2152.81 302.17,-2152.81 374.07,-2080.91 374.67,-2080.91 375,-2080.59 D55.2
NetD56_2: D56.2 S56.2 | length 170
  Bottom Layer w21: S56.2 1197.7,-2152.81 1239.7,-2152.81 1311.6,-2080.91 1312.17,-2080.91 1312.5,-2080.59 D56.2
NetD57_2: D57.2 S57.2 | length 169.9
  Bottom Layer w21: S57.2 4010.22,-2152.81 4052.22,-2152.81 4124.11,-2080.91 4124.67,-2080.91 4125,-2080.59 D57.2
NetD58_2: D58.2 S58.2 | length 170
  Bottom Layer w21: S58.2 6822.68,-2152.81 6864.68,-2152.81 6936.58,-2080.91 6937.17,-2080.91 6937.5,-2080.59 D58.2
NetD59_2: D59.2 S59.2 | length 169.9
  Bottom Layer w21: S59.2 7760.22,-2152.81 7802.22,-2152.81 7874.11,-2080.91 7874.67,-2080.91 7875,-2080.59 D59.2
NetD60_2: D60.2 S60.2 | length 170
  Bottom Layer w21: S60.2 8697.68,-2152.81 8739.68,-2152.81 8811.58,-2080.91 8812.17,-2080.91 8812.5,-2080.59 D60.2
NetD61_2: D61.2 S61.2 | length 170
  Bottom Layer w21: S61.2 9635.18,-2152.81 9677.18,-2152.81 9749.08,-2080.91 9749.67,-2080.91 9750,-2080.59 D61.2
ROW1: D1.1 D2.1 D3.1 D4.1 D5.1 D6.1 D7.1 D8.1 D9.1 D10.1 D11.1 D12.1 D13.1 D14.1 U1.41 | length 11869.4
  Top Layer w21: v1(-635.99,591.4) -635.43,590.84 v1(-112.68,590.8)
  Bottom Layer w21: D1.1 -750,625.83 -715.04,590.87 -636.52,590.87 v1(-635.99,591.4) -410.14,365.54 -410.14,92.37 -345.18,27.4 -345.18,-258.22 -352.98,-266.03 -352.98,-551.65 -270.93,-633.7 -177.03,-633.7 U1.41 ; v1(-112.68,590.8) -66.42,637.06 -12.63,637.06 -11.85,637.84 -0.33,637.84 0,638.16 D2.1 ; 11.85,637.84 12.63,637.06 737.37,637.06 738.15,637.84 749.67,637.84 D3.1@750,638.16 ; D3.1 D3.1@750,638.16 ; D4.1 D4.1@1500,638.16 ; D5.1 D5.1@2250,638.16 ; D6.1 D6.1@3000,638.16 ; D7.1 D7.1@3750,638.16 ; D8.1 D8.1@4500,638.16 ; D9.1 D9.1@5250,638.16 ; D10.1 D10.1@6000,638.16 ; D11.1 D11.1@6750,638.16 ; D12.1 D12.1@7500,638.16 ; D13.1 D13.1@8250,638.16 ; D14.1 9375,638.16 9374.67,637.84 9363.15,637.84 9362.37,637.06 8262.63,637.06 8261.85,637.84 8250.33,637.84 D13.1@8250,638.16 ; D3.1@750,638.16 750.33,637.84 761.85,637.84 762.63,637.06 1487.37,637.06 1488.15,637.84 1499.67,637.84 D4.1@1500,638.16 ; D4.1@1500,638.16 1500.33,637.84 1511.85,637.84 1512.63,637.06 2248.89,637.06 D5.1@2250,638.16 ; D5.1@2250,638.16 2250.33,637.84 2261.85,637.84 2262.63,637.06 2987.37,637.06 2988.15,637.84 2999.67,637.84 D6.1@3000,638.16 ; D6.1@3000,638.16 3000.33,637.84 3011.85,637.84 3012.63,637.06 3737.37,637.06 3738.15,637.84 3749.67,637.84 D7.1@3750,638.16 ; D7.1@3750,638.16 3750.33,637.84 3761.85,637.84 3762.63,637.06 4487.37,637.06 4488.15,637.84 4499.67,637.84 D8.1@4500,638.16 ; D8.1@4500,638.16 4500.33,637.84 4511.85,637.84 4512.63,637.06 5237.37,637.06 5238.15,637.84 5249.67,637.84 D9.1@5250,638.16 ; D9.1@5250,638.16 5250.33,637.84 5261.85,637.84 5262.63,637.06 5987.37,637.06 5988.15,637.84 5999.67,637.84 D10.1@6000,638.16 ; D10.1@6000,638.16 6000.33,637.84 6011.85,637.84 6012.63,637.06 6748.89,637.06 D11.1@6750,638.16 ; D11.1@6750,638.16 6750.33,637.84 6761.85,637.84 6762.63,637.06 7487.37,637.06 7488.15,637.84 7499.67,637.84 D12.1@7500,638.16 ; D12.1@7500,638.16 7500.33,637.84 7511.85,637.84 7512.63,637.06 8237.37,637.06 8238.15,637.84 8249.67,637.84 D13.1@8250,638.16
ROW2: D15.1 D16.1 D17.1 D18.1 D19.1 D20.1 D21.1 D22.1 D23.1 D24.1 D25.1 D26.1 D27.1 D28.1 U1.40 | length 12487.6
  Top Layer w21: v1(-631.49,445.34) -631.49,441.98 -477.79,288.28 209.75,288.28 v1(262.81,235.21)
  Bottom Layer w21: D15.1 -468.75,246.98 -469.08,247.31 -582.6,247.31 -636.53,301.23 -636.53,440.29 v1(-631.49,445.34) -638.21,445.34 -698.38,385.16 -698.38,-250.09 -273.26,-675.22 -174,-675.22 U1.40 ; v1(262.81,235.21) 266.51,238.92 468.42,238.92 468.75,239.24 D16.1 468.75,211.45 561.67,118.52 904.48,118.52 989.09,33.91 989.09,-36.06 1055.03,-101.99 D17.1 ; D17.1@1125.33,-112.16 1136.85,-112.16 1137.63,-112.94 1862.37,-112.94 1863.15,-112.16 1874.67,-112.16 D18.1@1875,-111.84 ; D18.1 D18.1@1875,-111.84 ; D19.1@2625,-113.42 1887.63,-113.42 1886.37,-112.16 1875.33,-112.16 D18.1@1875,-111.84 ; D19.1 2625,-111.84 2625.33,-112.16 2636.37,-112.16 2637.63,-113.42 3362.37,-113.42 3363.63,-112.16 3374.67,-112.16 D20.1@3375,-111.84 ; D20.1 D20.1@3375,-111.84 ; D21.1 D21.1@4125,-111.84 ; D22.1 D22.1@4875,-111.84 ; D23.1 D23.1@5625,-111.84 ; D24.1 D24.1@6375,-111.84 ; D25.1 D25.1@7125,-111.84 ; D26.1 D26.1@7875,-111.84 ; D27.1 D27.1@8625,-111.84 ; D28.1 9562.5,-111.84 9562.17,-112.16 9552.33,-112.16 9551.55,-112.94 8637.63,-112.94 8636.85,-112.16 8625.33,-112.16 D27.1@8625,-111.84 ; D20.1@3375,-111.84 3375.33,-112.16 3386.85,-112.16 3387.63,-112.94 4112.37,-112.94 4113.15,-112.16 4124.67,-112.16 D21.1@4125,-111.84 ; D21.1@4125,-111.84 4125.33,-112.16 4136.85,-112.16 4137.63,-112.94 4862.37,-112.94 4863.15,-112.16 4874.67,-112.16 D22.1@4875,-111.84 ; D22.1@4875,-111.84 4875.33,-112.16 4886.85,-112.16 4887.63,-112.94 5612.37,-112.94 5613.15,-112.16 5624.67,-112.16 D23.1@5625,-111.84 ; D23.1@5625,-111.84 5625.33,-112.16 5636.85,-112.16 5637.63,-112.94 6362.37,-112.94 6363.15,-112.16 6374.67,-112.16 D24.1@6375,-111.84 ; D24.1@6375,-111.84 6375.33,-112.16 6386.85,-112.16 6387.63,-112.94 7112.37,-112.94 7113.15,-112.16 7124.67,-112.16 D25.1@7125,-111.84 ; D25.1@7125,-111.84 7125.33,-112.16 7136.85,-112.16 7137.63,-112.94 7862.37,-112.94 7863.15,-112.16 7874.67,-112.16 D26.1@7875,-111.84 ; D26.1@7875,-111.84 7875.33,-112.16 7886.85,-112.16 7887.63,-112.94 8612.37,-112.94 8613.15,-112.16 8624.67,-112.16 D27.1@8625,-111.84
ROW3: D29.1 D30.1 D31.1 D32.1 D33.1 D34.1 D35.1 D36.1 D37.1 D38.1 D39.1 D40.1 D41.1 U1.39 | length 10121
  Top Layer w21: v1(-8.61,-554.87) 287.95,-851.44 v1(479.09,-851.44)
  Bottom Layer w21: D29.1@-468.75,-862.97 -309.56,-862.97 -226.71,-780.12 -226.71,-731.52 -204.95,-709.77 -164,-709.77 U1.39 ; U1.39@-57.63,-603.39 -23.61,-569.37 -23.11,-569.37 v1(-8.61,-554.87) ; v1(479.09,-851.44) 486.94,-851.44 498.47,-862.97 549.87,-862.97 550.68,-862.16 562.17,-862.16 562.5,-861.84 D30.1 ; D30.1@562.83,-862.16 574.32,-862.16 575.13,-862.97 1299.87,-862.97 1300.68,-862.16 1312.17,-862.16 1312.5,-861.84 D31.1 ; D31.1@1322.39,-861.58 1323.78,-862.97 2049.87,-862.97 2050.68,-862.16 2062.17,-862.16 2062.5,-861.84 D32.1 ; D32.1@2072.39,-861.58 2073.78,-862.97 2799.87,-862.97 2800.68,-862.16 2812.17,-862.16 D33.1@2812.5,-861.84 ; D34.1 3562.5,-862.97 2825.13,-862.97 2824.32,-862.16 2812.83,-862.16 D33.1@2812.5,-861.84 ; D34.1@3572.39,-861.58 3573.78,-862.97 4299.87,-862.97 4300.68,-862.16 4312.17,-862.16 D35.1@4312.5,-861.84 ; D35.1 D35.1@4312.5,-861.84 ; D36.1 5062.5,-861.84 5061.36,-862.97 4325.13,-862.97 4324.32,-862.16 4312.83,-862.16 D35.1@4312.5,-861.84 ; D36.1@5064.83,-855.04 5072.76,-862.97 5799.87,-862.97 5800.68,-862.16 5812.17,-862.16 D37.1@5812.5,-861.84 ; D37.1 D37.1@5812.5,-861.84 ; D38.1 6562.5,-862.97 5825.13,-862.97 5824.32,-862.16 5812.83,-862.16 D37.1@5812.5,-861.84 ; D38.1@6563.64,-862.97 7299.87,-862.97 7300.68,-862.16 7312.17,-862.16 D39.1@7312.5,-861.84 ; D39.1 D39.1@7312.5,-861.84 ; D40.1 D40.1@8062.5,-861.84 ; D41.1 9281.25,-861.84 9280.92,-862.16 9269.43,-862.16 9268.62,-862.97 8075.13,-862.97 8074.32,-862.16 8062.83,-862.16 D40.1@8062.5,-861.84 ; D33.1@2812.5,-861.84 D33.1 D33.1@2812.5,-861.84 ; D39.1@7312.5,-861.84 7312.83,-862.16 7324.32,-862.16 7325.13,-862.97 8049.87,-862.97 8050.68,-862.16 8062.17,-862.16 D40.1@8062.5,-861.84
ROW4: D42.1 D43.1 D44.1 D45.1 D46.1 D47.1 D48.1 D49.1 D50.1 D51.1 D52.1 D53.1 U1.37 | length 10685.3
  Bottom Layer w21: D42.1 -281.25,-1611.84 -281.58,-1612.16 -293.1,-1612.16 -293.88,-1612.95 -340.3,-1612.95 -417.19,-1536.06 -417.19,-1150.41 -65.7,-798.92 -65.7,-700.55 U1.37 ; -269.4,-1612.16 -268.62,-1612.95 924.87,-1612.95 925.65,-1612.16 937.17,-1612.16 D43.1@937.5,-1611.84 ; D43.1 D43.1@937.5,-1611.84 ; D44.1 D44.1@1687.5,-1611.84 ; D45.1 D45.1@2437.5,-1611.84 ; D46.1 3187.5,-1611.84 3187.17,-1612.16 3175.65,-1612.16 3174.87,-1612.95 2450.13,-1612.95 2449.35,-1612.16 2437.83,-1612.16 D45.1@2437.5,-1611.84 ; D46.1@3188.61,-1612.95 3924.87,-1612.95 3925.65,-1612.16 3937.17,-1612.16 D47.1@3937.5,-1611.84 ; D47.1 D47.1@3937.5,-1611.84 ; D48.1 4687.5,-1611.84 4687.17,-1612.16 4675.65,-1612.16 4674.87,-1612.95 3950.13,-1612.95 3949.35,-1612.16 3937.83,-1612.16 D47.1@3937.5,-1611.84 ; D48.1@4688.61,-1612.95 5424.87,-1612.95 5425.65,-1612.16 5437.17,-1612.16 D49.1@5437.5,-1611.84 ; D49.1 D49.1@5437.5,-1611.84 ; D50.1 6187.5,-1611.84 6187.17,-1612.16 6175.65,-1612.16 6174.87,-1612.95 5450.13,-1612.95 5449.35,-1612.16 5437.83,-1612.16 D49.1@5437.5,-1611.84 ; D50.1@6188.61,-1612.95 6924.87,-1612.95 6925.65,-1612.16 6937.17,-1612.16 6937.5,-1611.84 D51.1 ; D51.1@6938.61,-1612.95 7674.87,-1612.95 7675.65,-1612.16 7687.17,-1612.16 7687.5,-1611.84 D52.1 ; D52.1@7688.61,-1612.95 9081.12,-1612.95 9081.9,-1612.16 9093.42,-1612.16 9093.75,-1611.84 D53.1 ; D43.1@937.5,-1611.84 937.83,-1612.16 949.35,-1612.16 950.13,-1612.95 1674.87,-1612.95 1675.65,-1612.16 1687.17,-1612.16 D44.1@1687.5,-1611.84 ; D44.1@1687.5,-1611.84 1687.83,-1612.16 1699.35,-1612.16 1700.13,-1612.95 2424.87,-1612.95 2425.65,-1612.16 2437.17,-1612.16 D45.1@2437.5,-1611.84
ROW5: D54.1 D55.1 D56.1 D57.1 D58.1 D59.1 D60.1 D61.1 U1.38 | length 11971.7
  Bottom Layer w21: U1.38 -96.7,-687.01 -96.7,-786.08 -448.19,-1137.57 -448.19,-1836.35 -562.5,-1950.66 D54.1 D55.1 D56.1 1728.73,-1960.51 1805.93,-2037.7 2926.7,-2037.7 3003.9,-1960.51 D57.1 5103.48,-1960.51 5180.68,-2037.7 6158.83,-2037.7 6236.03,-1960.51 D58.1 D59.1 D60.1 D61.1
SCLK: J?.4 U1.9 | length 956.7
  Bottom Layer w10: U1.9@-8.99,-229.17 -28.57,-209.59 -28.57,-162.93 20.3,-114.06 82.76,-114.06 142.86,-53.96 142.86,283.48 J?.4
SS: J?.3 U1.8 | length 947.5
  Bottom Layer w10: U1.8@-29.41,-253.3 -29.41,-250.14 -48.57,-230.98 -48.57,-154.64 12.02,-94.06 74.48,-94.06 122.63,-45.9 122.63,363.26 J?.3
UCAP: C3.2 U1.6 | length 93
  Bottom Layer w10: C3.2@-102.86,-215.71 -102.86,-265.78 -73.95,-294.68 U1.6@-73.95,-296.76
VCC: C4.2 C5.2 C6.2 C7.2 C8.2 J1.1 J?.1 R3.1 U1.2 U1.7 U1.14 U1.24 U1.34 U1.44 | length 3106.8
  Top Layer w25: v1(-495.56,518.58) -494.08,517.1 -112.93,517.1 v1(-111.46,515.62)
  Bottom Layer w10: C5.2 C5.2@-230.95,-460.99 ; U1.44 -221.95,-469.99 -230.31,-469.99 -230.95,-469.35 C5.2@-230.95,-460.99 ; U1.2 -134.83,-415.13 -134.83,-423.41 -172.4,-460.99 C5.2@-230.95,-460.99 ; U1.7@-51.68,-277.64 -36.22,-293.1 -28.21,-293.1 -26.88,-294.42 44.8,-294.42 82.81,-256.41 156.08,-256.41 U1.14@179.39,-233.1 ; U1.34@37.41,-731.42 48.63,-742.63 C6.2 ; U1.14 235.16,-176.97 C7.2 ; C7.2@245.79,-176.97 R3.1 ; U1.24@335.28,-530.98 319.83,-515.52 319.83,-507.51 318.5,-506.18 318.5,-470.52 329.55,-459.48 C8.2
  Bottom Layer w16: -366.14,901.94 J1.1
  Bottom Layer w21: -497.47,770.61 -366.14,901.94
  Bottom Layer w25: -497.47,770.61 -497.47,520.49 -269.19,292.21 -269.19,51.68 -300.38,20.49 C4.2@-300.38,-306.3 ; C4.2 -300.69,-446.34 -286.05,-460.99 C5.2 ; v1(-111.46,515.62) J?.1
XT_N: C2.2 U1.17 Y1.2 | length 804.2
  Bottom Layer w21: U1.17 400.4,-145.36 721.37,-145.36 765.42,-189.41 Y1.2 815.42,-137.76 821.27,-131.91 C2.2
XT_P: C1.2 U1.16 Y1.1 | length 847
  Bottom Layer w21: U1.16 387.35,-113.87 678.95,-113.87 763.41,-29.41 Y1.1 815.42,-81.05 821.27,-86.91 C1.2
pads on no net: J1.4 S1. S2. S3. S4. S5. S6. S7. S8. S9. S10. S11. S12. S13. S14. S15. S16. S17. S18. S19. S20. S21. S22. S23. S24. S25. S26. S27. S28. S29. S30. S31. S32. S33. S34. S35. S36. S37. S38. S39. S40. S41. S42. S43. S44. S45. S46. S47. S48. S49. S50. S51. S52. S53. S54. S55. S56. S57. S58. S59. S60. S61. U1.1 U1.12 U1.42

## Polygon pours and split planes (outlines as drawn)
GND on Top Layer "GND_L01_P000" (solid, remove dead copper, pour order 0): -882.16,-2632.57 cw(c-882.16,-2553.83) -960.9,-2553.82 -960.15,1026.14 cw(c-881.41,1026.12) -881.41,1104.86 10117.57,1104.86 cw(c10117.57,1026.12) 10196.31,1026.12 10196.31,-2553.65 cw(c10117.57,-2553.65) 10117.57,-2632.39

## Silkscreen, mask and mechanical layers (free items; w line width, h text height)
Mechanical 2:
  drawing of 323 lines, arcs and shapes, not listed
Mechanical 3:
  the board outline again, w0.5
Mechanical 10:
  the board outline again, w10

## Text inside footprints (layer, text, board x,y; h text height)
J?: Bottom Overlay "_RST" at 687.49,435.62 h30 r90; Bottom Overlay "VCC" at 90,435.62 h30 r90; Bottom Overlay "GND" at 189.99,435.62 h30 r90; Bottom Overlay "SS" at 289.99,435.62 h30 r90; Bottom Overlay "SCLK" at 389.99,435.62 h30 r90; Bottom Overlay "MISO" at 589.99,435.62 h30 r90; Bottom Overlay "MOSI" at 489.99,435.62 h30 r90
U1: Mechanical 1 "GND" at 311.65,-452.38 h11.81 r135; Mechanical 1 "AVCC" at 281.03,-466.3 h11.81 r135; Mechanical 1 "RESET_" at 132.78,-241.77 h11.81 r45; Mechanical 1 "VCC" at 155.75,-264.74 h11.81 r45; Mechanical 1 "GND" at 178.02,-287.01 h11.81 r45; Mechanical 1 "XTAL2" at 200.29,-309.28 h11.81 r45; Mechanical 1 "XTAL1" at 222.56,-331.55 h11.81 r45; Mechanical 1 "AREF" at -76.44,-496.92 h11.81 r45; Mechanical 1 "GND" at 71.11,-661.17 h11.81 r45; Mechanical 1 "VCC" at 93.38,-683.44 h11.81 r45; Mechanical 1 "GND" at -107.06,-483 h11.81 r45; Mechanical 1 "AVCC" at -120.98,-452.38 h11.81 r45; Mechanical 1 "UVCC" at -129.32,-412.29 h11.81 r135; Mechanical 1 "D-" at -107.05,-390.01 h11.81 r135; Mechanical 1 "D+" at -84.78,-367.74 h11.81 r135; Mechanical 1 "UGND" at -62.51,-345.47 h11.81 r135; Mechanical 1 "UCAP" at -40.24,-323.2 h11.81 r135; Mechanical 1 "VBUS" at -17.96,-300.93 h11.81 r135; Mechanical 1 "SS" at 4.31,-278.66 h11.81 r135; Mechanical 1 "SCLK" at 26.58,-256.39 h11.81 r135; Mechanical 1 "MOSI" at 48.85,-234.12 h11.81 r135; Mechanical 1 "MISO" at 71.12,-211.84 h11.81 r135